# EAGLE board base (EAGLE 7.3.0)
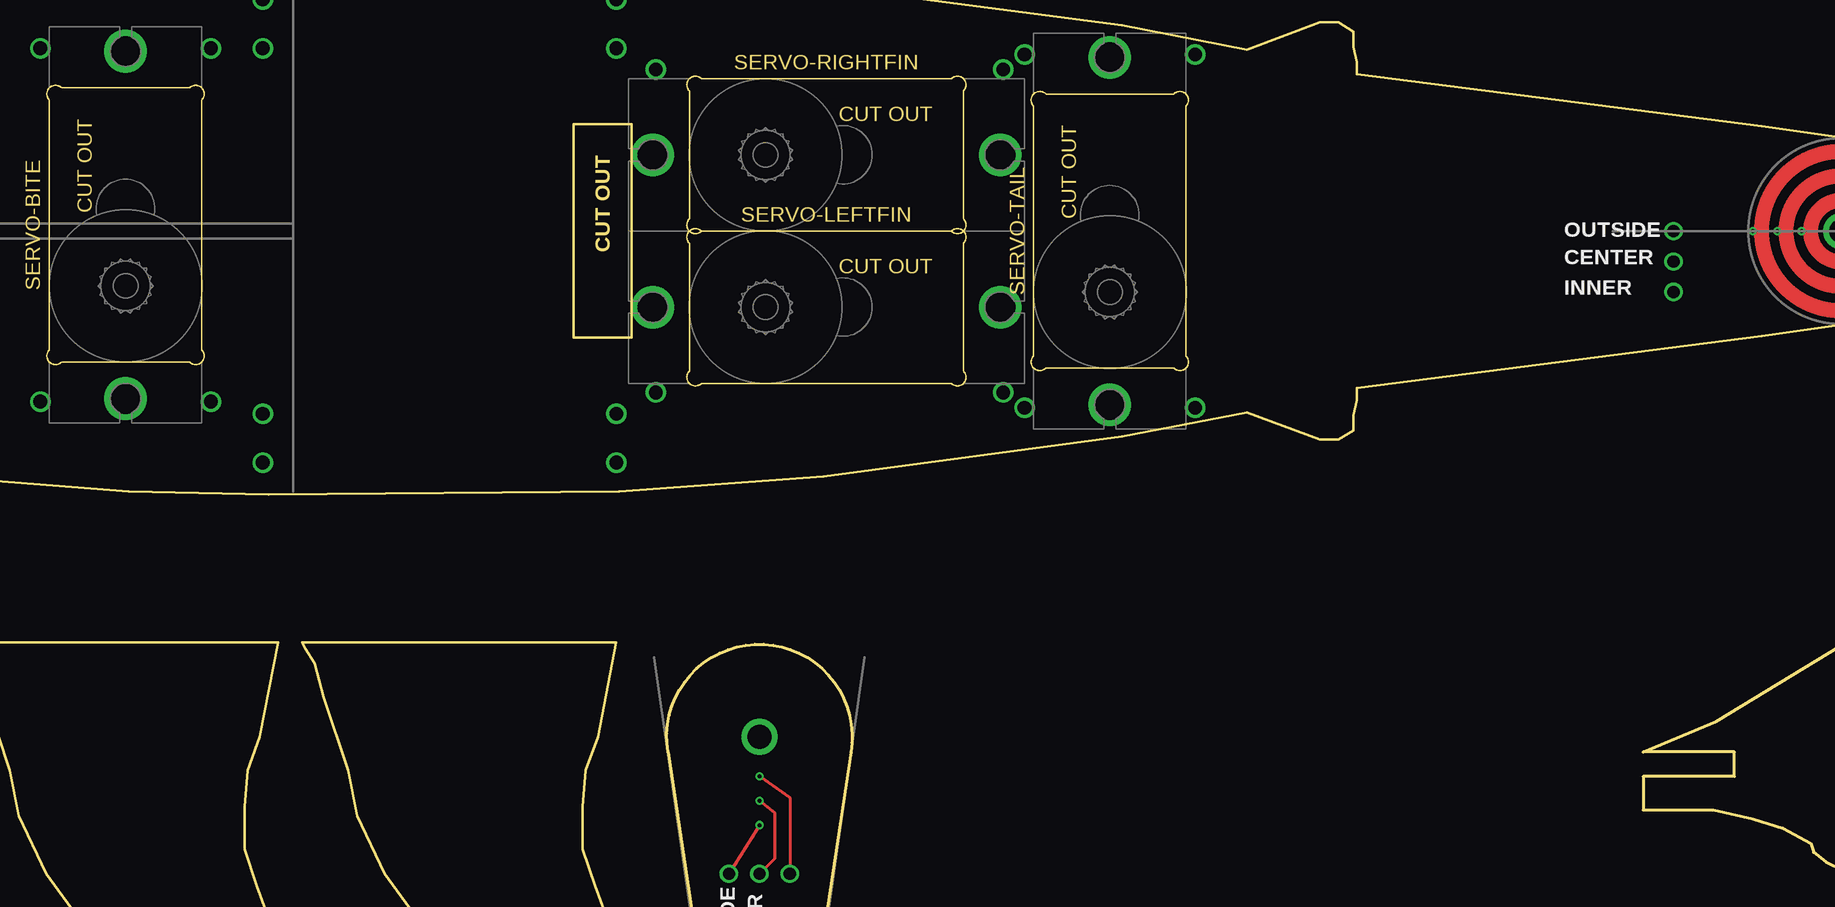
[diagram p0: board, top side]
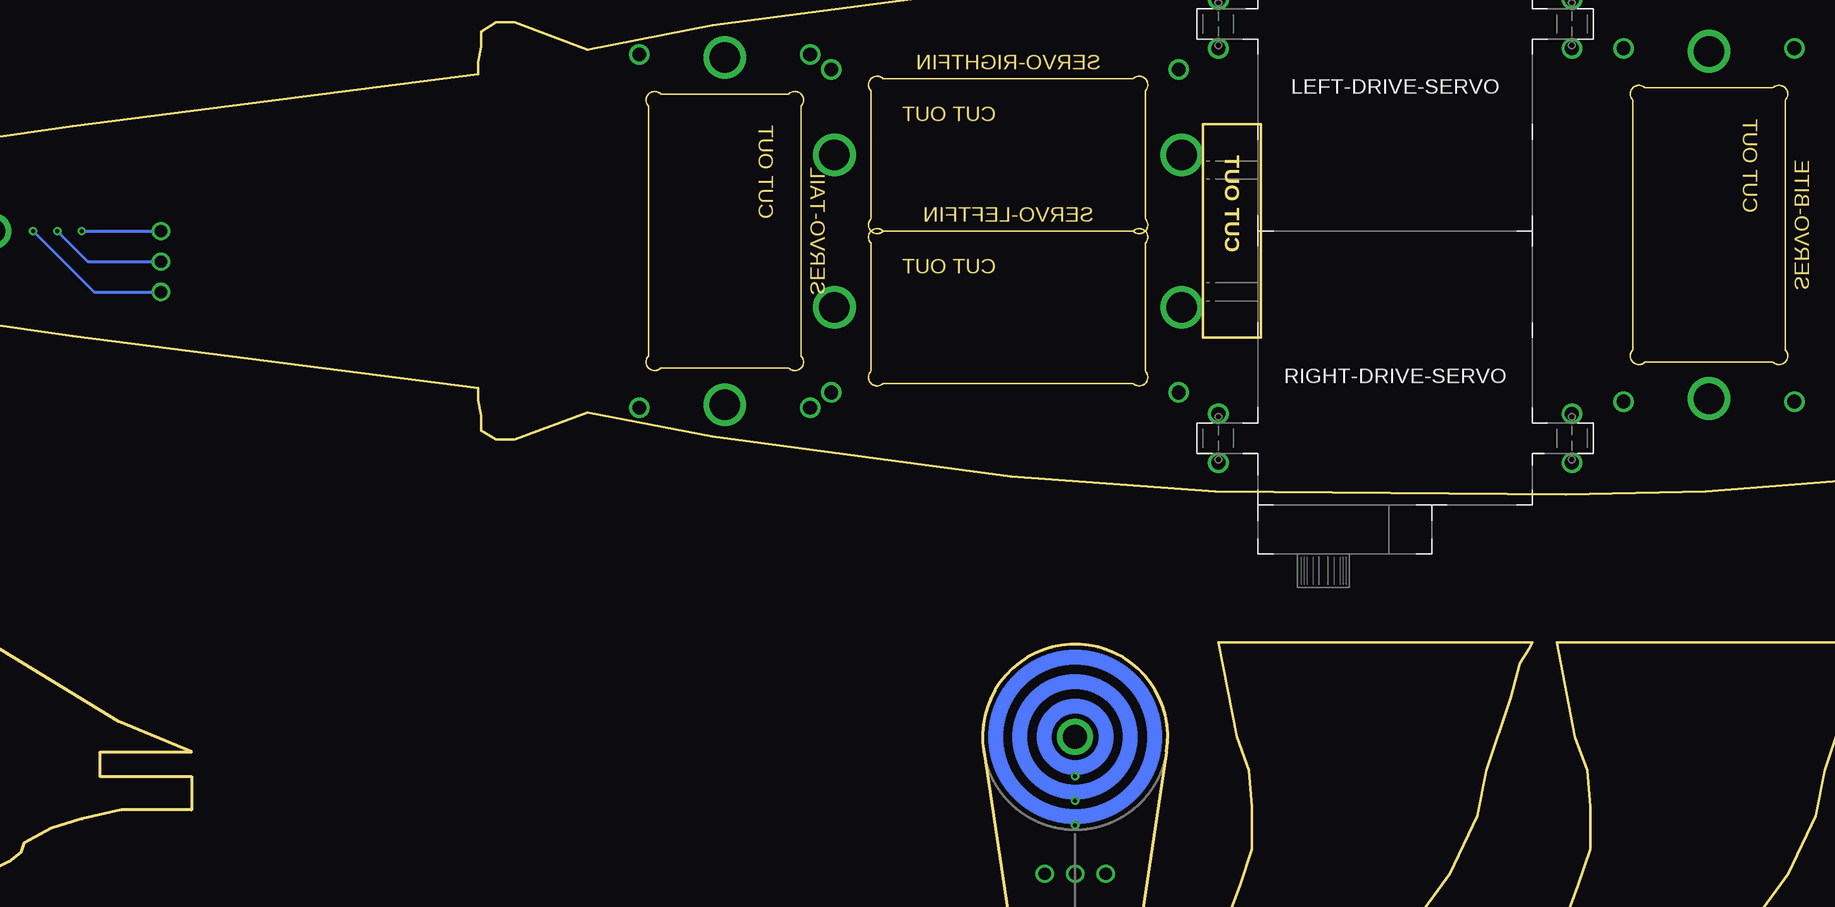
[diagram p1: board, bottom side, seen from below]

Size 95.16 x 25.82 mm. Coordinates in mm from the lower left corner, seen from the top.
Outline: 43.9,21.8 48.72,21.8 48.72,4.02 43.9,4.02 43.9,21.8
Copper layers (1*16): Top 0.0356mm / dielectric 1.5011mm / Bottom 0.0356mm
Design rules "LaenPCBOrder-tented": minimum track width 6mil, minimum drill 13mil, track to track 6mil, track to pad 6mil, pad to pad 6mil, via to via 6mil, smd to smd 0mil, copper to edge 15mil, drill to drill 6mil, minimum pad ring 7mil, minimum via ring 7mil, stop-mask expansion 4mil, vias tented up to drill 25mil, thermal gap 10mil
bRestrict: 4 lines
Milling: 214 lines

## Footprints (pad centres in the part's own frame; a part is rotated, then mirrored left to right if it is on the bottom)
1X03_LOCK = drill 1.016 pad 1.88: 1 0,0.127; 2 2.54,-0.127; 3 5.08,0.127
PAD-JUMPER-2-NO_YES_SILK = smd 0.635 x 1.27: 1 -0.45,0; 2 0.45,0
BUTTON-PJRC = smd 1.27 x 0.762: A1 -2.54,-1.016; A2 2.54,-1.016; B1 -2.54,1.016; B2 2.54,1.016
0402-0603-0805-UNIVERSAL = smd 0.254 x 0.254: + -0.762,0; - 0.762,0
WS2812B = smd 1.5 x 1: 1 -2.45,1.6; 2 -2.45,-1.6; 3 2.45,-1.6; 4 2.45,1.6
1X06_LOCK = drill 1.016 pad 1.88: 1 0,0; 2 2.54,-0.254; 3 5.08,0; 4 7.62,-0.254; 5 10.16,0; 6 12.7,-0.254
QFN20 = smd 0.75 x 0.3: 1 -2,1; 2 -2,0.5; 3 -2,0; 4 -2,-0.5; 5 -2,-1; 11 2,-1; 12 2,-0.5; 13 2,0; 14 2,0.5; 15 2,1 | smd 0.3 x 0.75: 6 -1,-2; 7 -0.5,-2; 8 0,-2; 9 0.5,-2; 10 1,-2; 16 1,2; 17 0.5,2; 18 0,2; 19 -0.5,2; 20 -1,2
JST-2-PTH = drill 0.7 pad 1.6: 1 -1,0; 2 1,0
1X02_LOCK = drill 1.016 pad 1.88: 1 -0.178,0; 2 2.718,0
SOT23-3 = smd 0.8 x 0.9: 1 -0.95,-1; 2 0.95,-1; 3 0,1.1
UART_SWITCHER_0603 = smd 1.27 x 1.27: RX_A -1.143,-1.143; RX_B -1.143,1.143; TX_A 1.143,1.143; TX_B 1.143,-1.143
SOT23 = smd 1 x 1.4: 1 -0.95,-1.1; 2 0.95,-1.1; 3 0,1.1
ESP-12 = smd 2 x 1.2: 1 -7.5,4.5; 2 -7.5,2.5; 3 -7.5,0.5; 4 -7.5,-1.5; 5 -7.5,-3.5; 6 -7.5,-5.5; 7 -7.5,-7.5; 8 -7.5,-9.5; 9 7.5,-9.5; 10 7.5,-7.5; 11 7.5,-5.5; 12 7.5,-3.5; 13 7.5,-1.5; 14 7.5,0.5; 15 7.5,2.5; 16 7.5,4.5

## Placement (x,y rotation side)
BITE  [1X03_LOCK]  86.82,89.87 0 top  (outside the outline)
BP_P1  [PAD-JUMPER-2-NO_YES_SILK]  112.73,97.24 220 top  (outside the outline)
BP_P2  [PAD-JUMPER-2-NO_YES_SILK]  112.82,89.56 220 top  (outside the outline)
BP_P3  [PAD-JUMPER-2-NO_YES_SILK]  112.99,81.74 220 top  (outside the outline)
BTN_PROG  BUTTONPJRC  [BUTTON-PJRC]  107.4,115.78 0 top  (outside the outline)
BTN_RST  BUTTONPJRC  [BUTTON-PJRC]  107.4,121.11 0 top  (outside the outline)
C_5V  10uF  [0402-0603-0805-UNIVERSAL]  70.57,97.24 0 top  (outside the outline)
C_BAT  10uF  [0402-0603-0805-UNIVERSAL]  76.66,94.95 180 top  (outside the outline)
C_BLKY  0.1uF  [0402-0603-0805-UNIVERSAL]  112.73,101.56 0 top  (outside the outline)
C_ESP1  1uF  [0402-0603-0805-UNIVERSAL]  77.43,105.37 0 top  (outside the outline)
C_ESP2  0.1uF  [0402-0603-0805-UNIVERSAL]  77.43,107.65 0 top  (outside the outline)
C_REG1  10uF  [0402-0603-0805-UNIVERSAL]  72.6,115.78 270 top  (outside the outline)
C_REG2  1uF  [0402-0603-0805-UNIVERSAL]  74.63,115.78 270 top  (outside the outline)
C_REGIN  10uF  [0402-0603-0805-UNIVERSAL]  64.47,115.53 180 top  (outside the outline)
C_S1  220uF  [0402-0603-0805-UNIVERSAL]  87.33,95.71 90 top  (outside the outline)
C_S2  10uF  [0402-0603-0805-UNIVERSAL]  89.36,95.71 90 top  (outside the outline)
C_S3  .1uF  [0402-0603-0805-UNIVERSAL]  91.65,95.71 90 top  (outside the outline)
C_SUP  10uF  [0402-0603-0805-UNIVERSAL]  67.01,97.75 270 top  (outside the outline)
D1  [WS2812B]  112.73,97.24 0 top  (outside the outline)
D2  [WS2812B]  112.73,89.62 0 top  (outside the outline)
D3  [WS2812B]  112.73,82 0 top  (outside the outline)
DRV_L  [1X03_LOCK]  86.82,76.41 0 top  (outside the outline)
DRV_R  [1X03_LOCK]  86.82,78.95 0 top  (outside the outline)
FIN_L  [1X03_LOCK]  86.82,81.49 0 top  (outside the outline)
FIN_R  [1X03_LOCK]  86.82,84.79 0 top  (outside the outline)
FTDI  [1X06_LOCK]  56.85,127.21 270 top  (outside the outline)
IC_LIPO  MCP73871  [QFN20]  68.28,92.92 0 top  (outside the outline)
J_LS_BP_TX  [PAD-JUMPER-2-NO_YES_SILK]  70.82,120.86 0 top  (outside the outline)
JP1  [JST-2-PTH]  73.36,101.56 0 top  (outside the outline)
JP2  [1X02_LOCK]  72.09,104.35 0 top  (outside the outline)
JP_LS_BP_RX  [PAD-JUMPER-2-NO_YES_SILK]  71.08,125.94 0 top  (outside the outline)
LED  [0402-0603-0805-UNIVERSAL]  56.85,99.02 0 top  (outside the outline)
LED_CHRG  [0402-0603-0805-UNIVERSAL]  56.85,91.4 0 top  (outside the outline)
LED_DONE  [0402-0603-0805-UNIVERSAL]  56.85,93.94 0 top  (outside the outline)
LED_PWR  [0402-0603-0805-UNIVERSAL]  56.85,96.48 0 top  (outside the outline)
LEFT-DRIVE-SERVO  [MICROSERVO-HORIZONTAL]  44.15,12.91 0 bottom
LOGO1  OSHW-LOGOS  [OSHW-LOGO-S]  138.39,75.39 0 top  (outside the outline)
NM_RX  MOSFET-NCHANNELSMD  [SOT23-3]  64.47,125.94 0 top  (outside the outline)
NM_TX  MOSFET-NCHANNELSMD  [SOT23-3]  64.47,120.86 0 top  (outside the outline)
R_BLNK  50  [0402-0603-0805-UNIVERSAL]  112.73,103.84 0 top  (outside the outline)
R_BOOT  [0402-0603-0805-UNIVERSAL]  110.45,108.67 0 top  (outside the outline)
R_LCHRG  [0402-0603-0805-UNIVERSAL]  61.93,91.4 0 top  (outside the outline)
R_LDONE  [0402-0603-0805-UNIVERSAL]  61.93,93.94 0 top  (outside the outline)
R_LED  [0402-0603-0805-UNIVERSAL]  61.93,99.02 0 top  (outside the outline)
R_LPWR  [0402-0603-0805-UNIVERSAL]  61.93,96.48 0 top  (outside the outline)
R_PD1  2k  [0402-0603-0805-UNIVERSAL]  75.9,92.41 0 top  (outside the outline)
R_PD2  100k  [0402-0603-0805-UNIVERSAL]  75.9,90.38 0 top  (outside the outline)
R_PD3  150k  [0402-0603-0805-UNIVERSAL]  75.9,88.09 0 top  (outside the outline)
R_RST  [0402-0603-0805-UNIVERSAL]  110.7,119.59 0 top  (outside the outline)
R_RXH  [0402-0603-0805-UNIVERSAL]  61.42,125.94 90 top  (outside the outline)
R_RXL  [0402-0603-0805-UNIVERSAL]  68.03,125.94 270 top  (outside the outline)
R_TXH  [0402-0603-0805-UNIVERSAL]  61.42,120.86 90 top  (outside the outline)
R_TXL  [0402-0603-0805-UNIVERSAL]  68.03,120.86 270 top  (outside the outline)
RIGHT-DRIVE-SERVO  RIGHT-DRIVE-SERVO  [MICROSERVO-HORIZONTAL-FLIPPED]  21.29,12.91 180 bottom
SERVO-BITE  [MICROSERVER-VERTICAL]  12.91,1.99 90 top
SERVO-LEFTFIN  [MICROSERVER-VERTICAL]  53.55,0.21 0 top
SERVO-RIGHTFIN  [MICROSERVER-VERTICAL]  53.55,12.91 0 top
SERVO-TAIL  [MICROSERVER-VERTICAL]  94.95,1.48 90 top
TAIL  [1X03_LOCK]  86.82,87.33 0 top  (outside the outline)
UART_X  UART_SWITCHER0603  [UART_SWITCHER_0603]  75.9,123.4 0 top  (outside the outline)
VREG_3V  MC1700T-3v0  [SOT23]  69.55,115.78 90 top  (outside the outline)
WS_OUT  [1X03_LOCK]  110.19,74.63 0 top  (outside the outline)
X1  [ESP-12]  89.87,109.18 0 top  (outside the outline)

## Library data of the parts
BITE DRV_L DRV_R FIN_L FIN_R FTDI JP2 TAIL WS_OUT = SparkFun-Connectors
BP_P1-BP_P3 J_LS_BP_TX JP_LS_BP_RX = SparkFun-Passives
BTN_PROG BTN_RST C_5V C_BAT C_BLKY C_ESP1 C_ESP2 C_REG1 C_REG2 C_REGIN C_S1-C_S3 C_SUP D1-D3 LED LED_CHRG LED_DONE LED_PWR LEFT-DRIVE-SERVO LOGO1 NM_RX NM_TX R_BLNK R_BOOT R_LCHRG R_LDONE R_LED R_LPWR R_PD1-R_PD3 R_RST R_RXH R_RXL R_TXH R_TXL RIGHT-DRIVE-SERVO SERVO-BITE SERVO-LEFTFIN SERVO-RIGHTFIN SERVO-TAIL UART_X VREG_3V = tekdemo
IC_LIPO X1 = adafruit
JP1 = SparkFun-Connectors; PROD_ID: CONN-09863; SKU: PRT-09914

## Nets
3.0V: C_ESP1.- C_ESP2.- C_REG1.+ C_REG2.+ R_BOOT.- R_RST.- R_RXL.+ R_TXL.+ VREG_3V.2 X1.3 X1.8
4: TAIL.1 X1.14
5: BITE.1 X1.13
5V: C_5V.+ FTDI.4 IC_LIPO.3 IC_LIPO.4 IC_LIPO.9 IC_LIPO.17 IC_LIPO.18 IC_LIPO.19 LED_CHRG.+ LED_DONE.+ LED_PWR.+ NM_RX.1 NM_TX.1 R_RXH.+ R_TXH.+
12: FIN_L.1 X1.6
13: FIN_R.1 X1.7
14: DRV_R.1 X1.5
16: DRV_L.1 X1.4
BLINKY: R_BLNK.+ X1.11
BOOTLOADER: BTN_PROG.A1 BTN_PROG.A2 R_BOOT.+ X1.12
DTR: FTDI.1
ESP_RX_I: UART_X.TX_B X1.15
ESP_TX_O: UART_X.RX_B X1.16
FTDI_RX_I: JP_LS_BP_RX.2 NM_RX.2 R_RXL.- UART_X.RX_A
FTDI_RX_I_HV: FTDI.3 JP_LS_BP_RX.1 NM_RX.3 R_RXH.-
FTDI_TX_0: J_LS_BP_TX.2 NM_TX.2 R_TXL.- UART_X.TX_A
FTDI_TX_0_HV: FTDI.2 J_LS_BP_TX.1 NM_TX.3 R_TXH.-
GND: BITE.3 BTN_PROG.B1 BTN_PROG.B2 BTN_RST.B1 BTN_RST.B2 C_5V.- C_BAT.+ C_BLKY.- C_ESP1.+ C_ESP2.+ C_REG1.- C_REG2.- C_REGIN.- C_S1.- C_S2.- C_S3.- C_SUP.+ D1.3 D2.3 D3.3 DRV_L.3 DRV_R.3 FIN_L.3 FIN_R.3 FTDI.6 IC_LIPO.10 IC_LIPO.11 JP1.2 JP2.2 R_LED.- R_PD1.- R_PD2.- R_PD3.- TAIL.3 VREG_3V.1 WS_OUT.3 X1.9 X1.10
N$1: IC_LIPO.8 R_LCHRG.-
N$3: BP_P1.2 BP_P2.1 D1.2 D2.4
N$4: IC_LIPO.5 R_PD3.+
N$5: LED_CHRG.- R_LCHRG.+
N$6: LED.- R_LED.+
N$7: LED_DONE.- R_LDONE.+
N$8: LED_PWR.- R_LPWR.+
N$9: IC_LIPO.2 R_LPWR.-
N$10: BP_P1.1 D1.4 R_BLNK.-
N$11: BP_P2.2 BP_P3.1 D2.2 D3.4
N$12: BP_P3.2 D3.2 WS_OUT.2
N$20: IC_LIPO.7
N$21: IC_LIPO.6 R_LDONE.-
N$22: IC_LIPO.12 R_PD2.+
N$23: IC_LIPO.13 R_PD1.+
RESET: BTN_RST.A1 BTN_RST.A2 R_RST.+ X1.1
VBAT: C_BAT.- IC_LIPO.14 IC_LIPO.15 IC_LIPO.16 JP1.1 JP2.1
VSUPPLY: BITE.2 C_BLKY.+ C_REGIN.+ C_S1.+ C_S2.+ C_S3.+ C_SUP.- D1.1 D2.1 D3.1 DRV_L.2 DRV_R.2 FIN_L.2 FIN_R.2 IC_LIPO.1 IC_LIPO.20 LED.+ TAIL.2 VREG_3V.3 WS_OUT.1

## Tracks (layer width: path | path; a pad name or v marks a point on that pad's centre or on a via)
3.0V  (10 unrouted)
4  (1 unrouted)
5  (1 unrouted)
5V  (14 unrouted)
12  (1 unrouted)
13  (1 unrouted)
14  (1 unrouted)
16  (1 unrouted)
BLINKY  (1 unrouted)
BOOTLOADER  (3 unrouted)
ESP_RX_I  (1 unrouted)
ESP_TX_O  (1 unrouted)
FTDI_RX_I  (3 unrouted)
FTDI_RX_I_HV  (3 unrouted)
FTDI_TX_0  (3 unrouted)
FTDI_TX_0_HV  (3 unrouted)
GND  (37 unrouted)
  pour Bottom (isolate 0.229, rank 6): 54.82,128.99 54.82,72.35 119.34,72.35 119.08,128.73 118.83,128.99
N$1  (1 unrouted)
N$2  (via drill 1.14)
  other vias: 47.45,-2.33 47.45,-6.39
N$3  (3 unrouted)
N$4  (1 unrouted)
N$5  (1 unrouted)
N$6  (1 unrouted)
N$7  (1 unrouted)
N$8  (1 unrouted)
N$9  (1 unrouted)
N$10  (2 unrouted)
N$11  (3 unrouted)
N$12  (2 unrouted)
N$13  (via drill 1.14)
  other vias: 47.45,32.21 47.45,28.15
N$14  (via drill 1.14)
  other vias: 17.99,-2.33 17.99,-6.39
N$15
  pour Top (isolate 0.508, rank 6, hatched): 54.31,72.6 54.31,129.75 119.08,129.75 119.08,72.6
N$16  (via drill 1.14, 2.54)
  other vias: -0.55,28.15 13.67,28.15 6.56,27.9
N$17  (via drill 1.14, 2.54)
  other vias: 13.67,-1.31 -0.55,-1.31 6.56,-1.06
N$18  (via drill 1.14, 2.54)
  other vias: 81.49,27.64 95.71,27.64 88.6,27.39
N$19  (via drill 1.14, 2.54)
  other vias: 95.71,-1.82 81.49,-1.82 88.6,-1.57
N$21  (1 unrouted)
N$22  (1 unrouted)
N$23  (1 unrouted)
N$24  (via drill 1.14, 2.54)
  other vias: 79.71,-0.55 79.71,26.37 79.46,6.56 79.46,19.26
N$25  (via drill 1.14, 2.54)
  other vias: 50.76,-0.55 50.76,26.37 50.5,6.56 50.5,19.26
N$26  (via drill 1.14)
  other vias: 17.99,32.21 17.99,28.15
N$27  (via drill 2)
  other vias: 149.56,12.91
N$28  (via drill 0.33, 1.02)
  Bottom 0.254: v142.2,12.91 v135.59,12.91
N$29  (via drill 0.33, 1.02)
  Bottom 0.254: v144.23,12.91 141.69,10.37 v135.59,10.37
N$30  (via drill 0.33, 1.02)
  Bottom 0.254: v146.26,12.91 141.18,7.83 v135.59,7.83
N$31  (via drill 2)
  other vias: 59.39,-29.25
N$32  (via drill 0.33, 1.02)
  Top 0.254: v59.39,-36.62 v56.85,-40.68
N$33  (via drill 0.33, 1.02)
  Top 0.254: v59.39,-34.59 60.66,-35.6 60.66,-39.41 v59.39,-40.68
N$34  (via drill 0.33, 1.02)
  Top 0.254: v59.39,-32.56 61.93,-34.33 v61.93,-40.68
RESET  (3 unrouted)
VBAT  (5 unrouted)
VSUPPLY  (19 unrouted)
(copper drawn outside any net)
  shapes: Bottom circle x3, Top circle x3

## Text on the board
Top: LAN'd Shark V3 / 25-AUG-2015
Dimension: CUT OUT
tPlace: GND | S + - | + S - | S + - | OUTSIDE | CENTER | INNER | OUTSIDE | CENTER | INNER
tStop: LAN'd Shark V3 / 25-AUG-2015